# Altium PCB mas-cdc.PcbDoc
Units mil, origin at the board's own origin, x right, y up, seen from the top; angles counter-clockwise.
Board outline 472.44 x 787.4 mil, 4 copper layers (Top Layer, SIG, GND, Bottom Layer), stack 23.756 mil thick; 31 components, 28 nets, 156 pads, 47 vias.
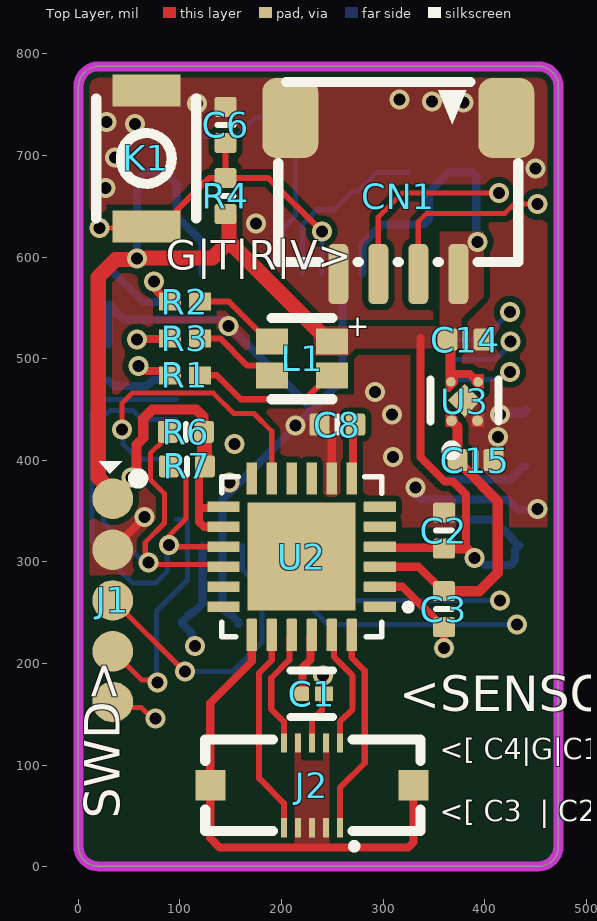
[diagram p0: Top Layer view]
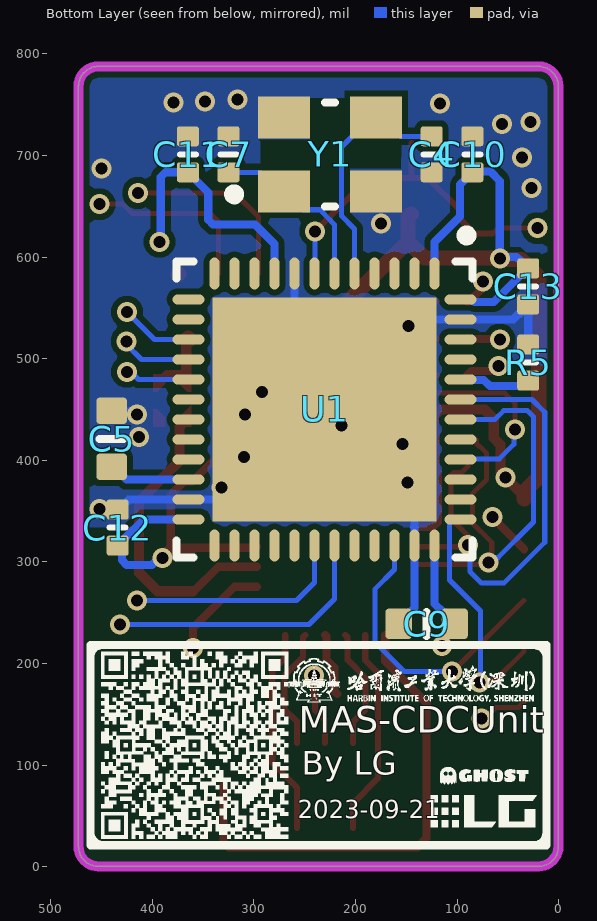
[diagram p1: Bottom Layer view, seen from below]
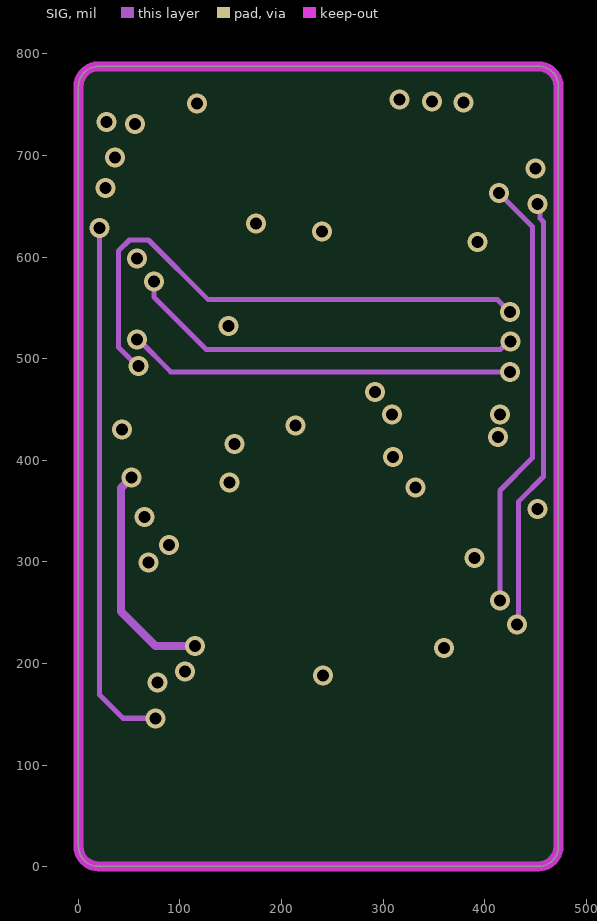
[diagram p2: SIG]
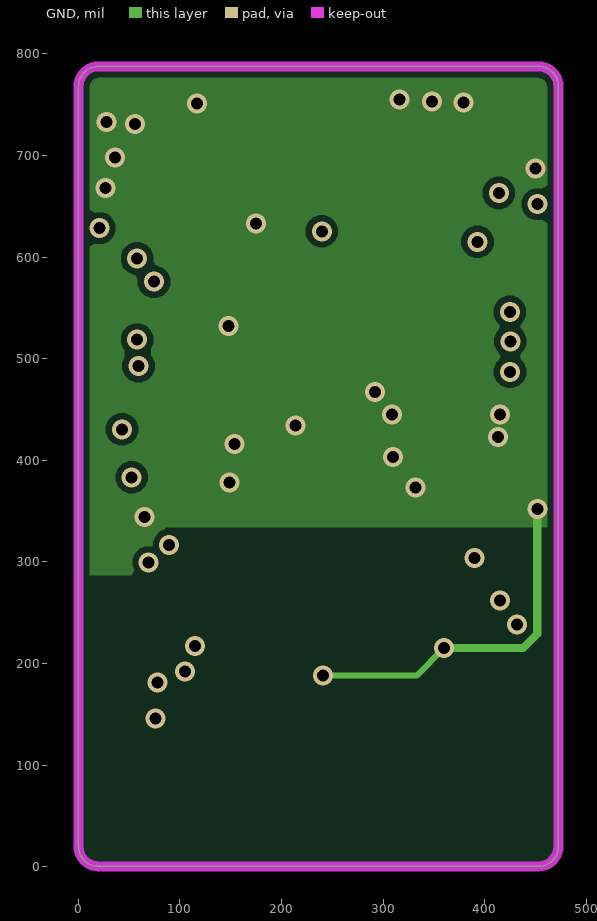
[diagram p3: GND]
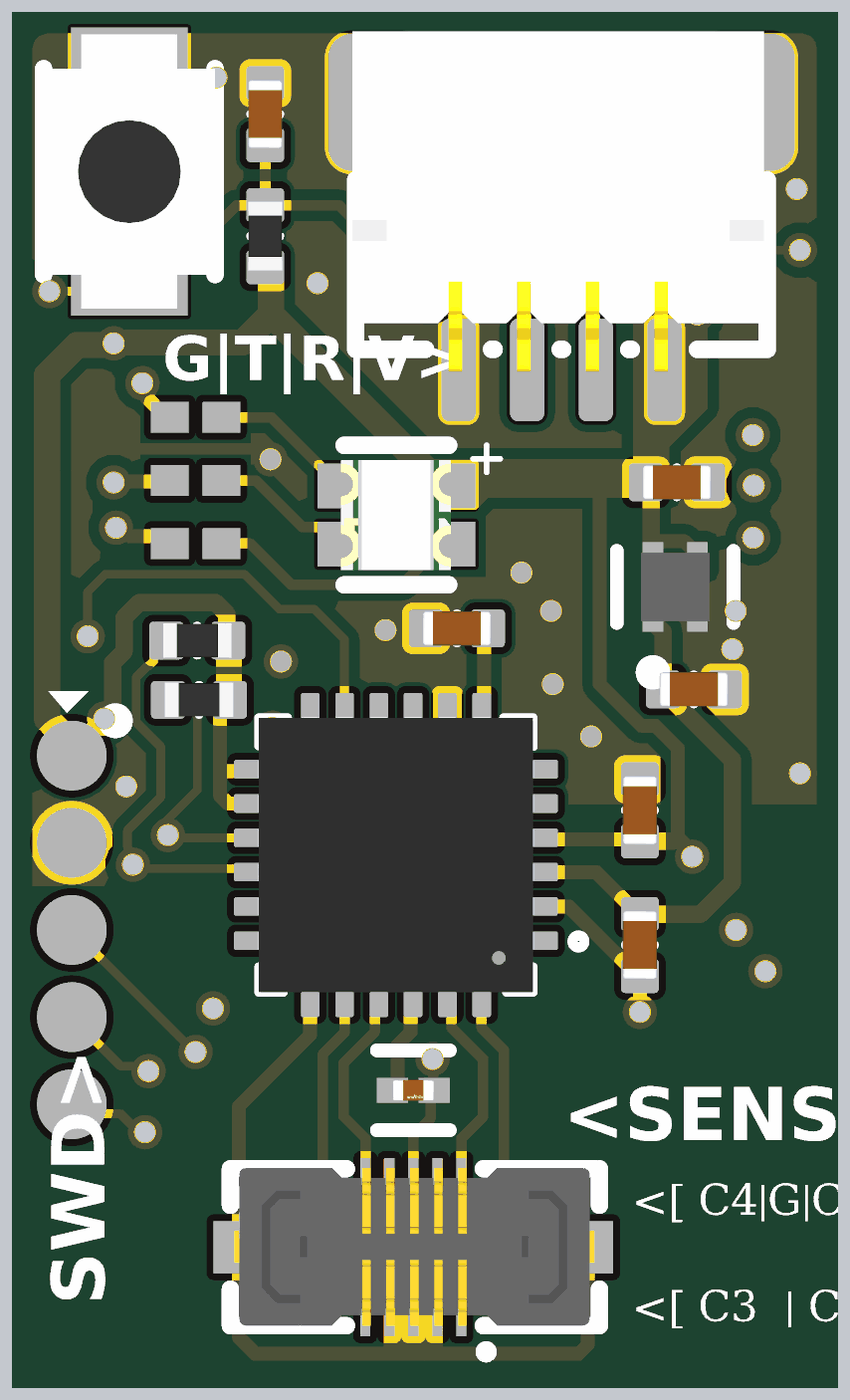
[diagram p4: 3D render of the assembled board from above, using the file's embedded part models]
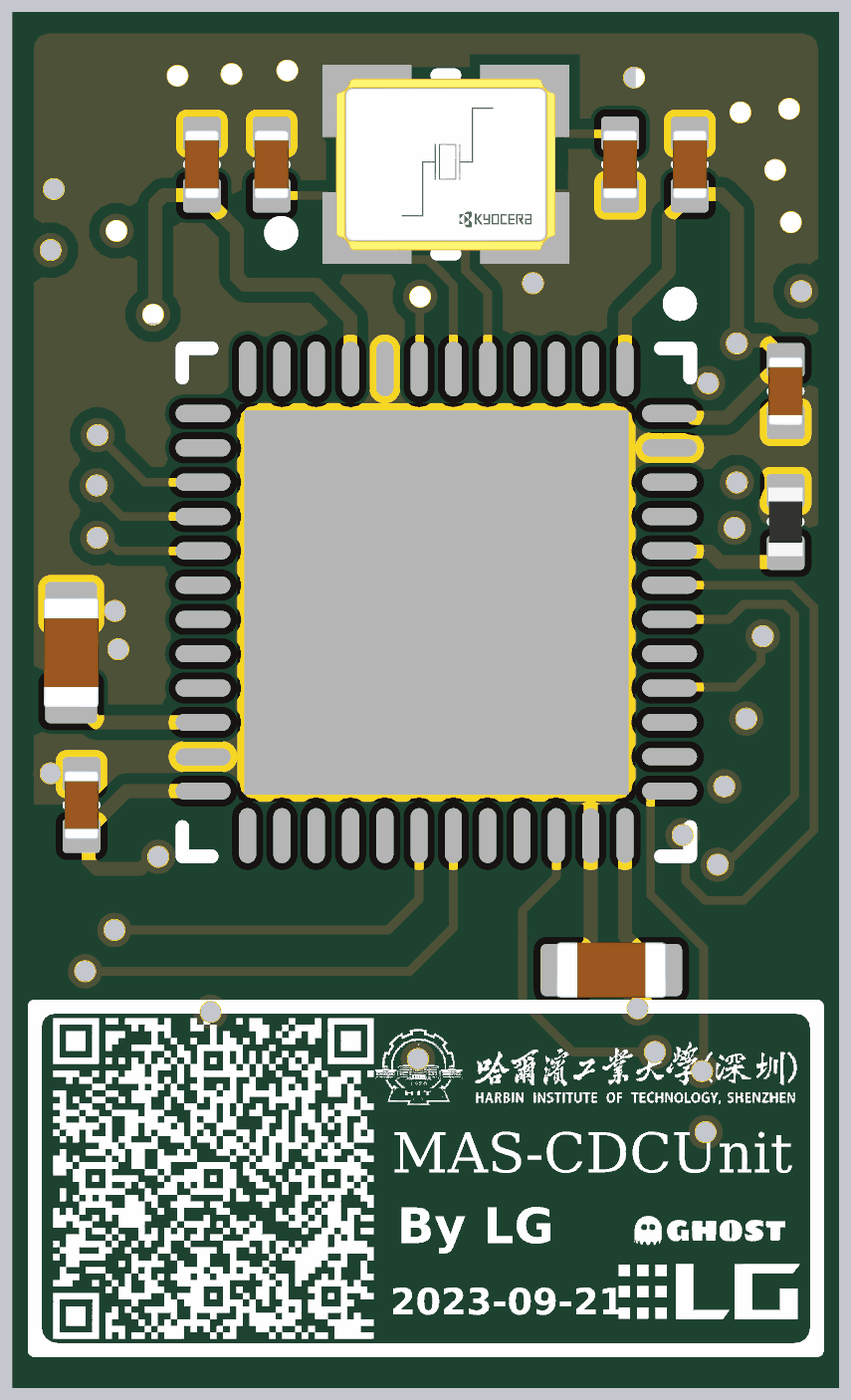
[diagram p5: 3D render of the assembled board from below, using the file's embedded part models]

## Layer stack, top to bottom
Top Solder: solder mask 0.4, Solder Resist, Dk 3.5
Top Layer: signal copper 1.4
Dielectric 2: prepreg 2.8, PP-006, Dk 4.1
SIG: signal copper 1.378
Dielectric 1: dielectric 12.6, FR-4, Dk 4.8
GND: signal copper 1.378
Dielectric 3: prepreg 2.8, PP-006, Dk 4.1
Bottom Layer: signal copper 1.4
Bottom Solder: solder mask 0.4, Solder Resist, Dk 3.5

## Board outline
0.25,19.93 ccw(c19.94,19.93) 19.94,0.25 453.01,0.25 ccw(c453.01,19.93) 472.69,19.93 472.69,767.97 ccw(c453.01,767.97) 453.01,787.65 19.94,787.65 ccw(c19.93,767.97) 0.25,767.97

## Design rules (kind name [scope] priority, off if disabled: settings)
Clearance [All] p1: gap=6 ignorepadtopadclearanceinfootprint=FALSE
PlaneConnect [All] p1: planeconnectstyle=Direct reliefexpansion=20 reliefentries=4 reliefconductorwidth=10 reliefairgap=10
PolygonConnect [All] p1: connectstyle=Direct reliefconductorwidth=10 reliefentries=4 polygonreliefangle="90 Angle" airgapwidth=10
RoutingVias [All] p1: holewidth=11.81 width=19.68 viastyle="Through Hole" minholewidth=11.81 minwidth=19.68 maxholewidth=11.81 maxwidth=19.68
SolderMaskExpansion [All] p1: expansion=4 istentingtop=FALSE
Width [All] p1: maxlimit=60 minlimit=5 preferedwidth=6
29 further rules are at their usual default settings.

## Components (designator, comment, footprint, x,y, rotation, side; value= is the part's Value field where it differs from the comment)
C1 "1pF" FP-GRM033-0_03-IPC_B 230,170 r0 top
C2 "Capacitor 10µF +/-40% 6.3V 0402" CAPC0402(1005)60_L 360,330.67 r270 top value=10uF
C3 "Capacitor 10µF +/-40% 6.3V 0402" CAPC0402(1005)60_L 360,253.38 r90 top value=4.7uF
C4 "Capacitor 100nF +/-20% 25V 0402" CAPC0402(1005)60_L 125,701.1 r270 bottom value=15pf
C5 "Capacitor 4.7µF +/-20% 10V 0603" CAPC0603(1608)100_L 440,421.1 r90 bottom value=4.7µF
C6 "Capacitor 100nF +/-20% 25V 0402" CAPC0402(1005)60_L 145,730 r270 top value=100nF
C7 "Capacitor 100nF +/-20% 25V 0402" CAPC0402(1005)60_L 325,701.1 r90 bottom value=15pf
C8 "Capacitor 10nF +/-20% 50V 0402" CAPC0402(1005)60_L 255,435 r0 top value=10nF
C9 "Capacitor 4.7µF +/-20% 10V 0603" CAPC0603(1608)100_L 130,239 r180 bottom value=4.7µF
C10 "Capacitor 100nF +/-20% 25V 0402" CAPC0402(1005)60_L 85,701.1 r270 bottom value=100nF
C11 "Capacitor 100nF +/-20% 25V 0402" CAPC0402(1005)60_L 365,701.1 r270 bottom value=100nF
C12 "Capacitor 100nF +/-20% 25V 0402" CAPC0402(1005)60_L 434.09,333.66 r270 bottom value=100nF
C13 "Capacitor 100nF +/-20% 25V 0402" CAPC0402(1005)60_L 30,571.1 r90 bottom value=100nF
C14 "Capacitor 1µF +/-20% 10V 0402" CAPC0402(1005)60_L 381.22,518.78 r0 top value=1µF
C15 "Capacitor 1µF +/-20% 10V 0402" CAPC0402(1005)60_L 391,400 r0 top value=1µF
CN1 "SH1.0-4P" CONN-SMD_4P-P1.00_WF10004-01200 315,660 r180 top
J1 "DEBUG-SWD-HEADER" DEBUG-SWD-HEADER-Footprint-1 34,362 r270 top
J2 "BM24-10DS/2-0.35V(51)" CONN-SMD_BM24-10DS-2-0.35V-51 230,80 r180 top
K1 "Button" SW-SMD_ST-1185X 67,697 r270 top
L1 "RGB-LED-1615" RGB-LED-1615-Footprint-1 220,500 r0 top
R1 "500R" RESC0603X26X15ML03T05 105,483.6 r180 top
R2 "500R" RESC0603X26X15ML03T05 105,556.1 r180 top
R3 "500R" RESC0603X26X15ML03T05 105,519.85 r180 top
R4 "Resistor 10K  +/-1 % 0402 63 mW" RESC0402(1005)_L 145,660 r270 top value=10k
R5 "Resistor 10K  +/-1 % 0402 63 mW" RESC0402(1005)_L 30,496.1 r90 bottom value=10k
R6 "Resistor 4K7  +/-1 % 0402 63 mW" RESC0402(1005)_L 106,428 r180 top value=4.7k
R7 "Resistor 4K7  +/-1 % 0402 63 mW" RESC0402(1005)_L 107,394 r180 top value=4.7k
U1 "STM32F411CEU6" STM-UFQFPN48_L 230.47,449.96 r270 bottom
U2 "PCAP04" QFN-24-PAD 220,305 r180 top
U3 "NCP114AMX180TBG" FP-517CU-MFG 380.24,458.78 r0 top
Y1 "25M 3225 12pF" FP-CX3225GB-MFG 225,701.1 r180 bottom

## Footprints (in the part's own frame and the unit in brackets; to place one, negate y for a bottom-side part, rotate by r counter-clockwise, add the part's x,y. Pads: shape width x height; smd on the part's side, far side on the other; paste and mask are expansions set on the pad)
CAPC0402(1005)60_L [mm] "Chip Capacitor, Body 1.0x0.5mm, Height 0.6mm, IPC High Density"
  rrect25% 0.5x0.55 smd: 1(-0.45,0) 2(0.45,0)
  silkscreen extent 0,-0.2 0,0.2, body extent -0.5,-0.25 0.5,0.25, height 0.6
CAPC0603(1608)100_L [mm] "Chip Capacitor, Body 1.6x0.8mm, Height 1.0mm, IPC High Density"
  rrect25% 0.66x0.76 smd: 1(-0.7,0) 2(0.7,0)
  silkscreen extent 0,-0.3 0,0.3, body extent -0.8,-0.4 0.8,0.4, height 0.95
CONN-SMD_4P-P1.00_WF10004-01200 [mm]
  rrect50% 0.5x1.5 smd mask+0.051: 1(-1.5,1.95) 2(-0.5,1.95) 3(0.5,1.95) 4(1.5,1.95)
  rrect50% 1.4x2 smd mask+0.051: 5(2.7,-1.95) 6(-2.7,-1.95)
  silkscreen extent -3,-2.85 3,1.65, body extent -2.95,-2.98 3.05,1.97, height 2.9
CONN-SMD_BM24-10DS-2-0.35V-51 [mm] "板对板连接器"
  rect 0.15x0.48 smd: 1(-0.7,1.06) 2(-0.35,1.06) 3(0,1.06) 4(0.35,1.06) 5(0.7,1.06) 6(0.7,-1.06) 7(0.35,-1.06) 8(0,-1.06) 9(-0.35,-1.06) 10(-0.7,-1.06)
  rect 0.75x0.76 smd: 11(2.54,0) 12(-2.54,0)
  silkscreen extent -2.71,-1.14 2.67,1.55, body extent -2.64,-1.16 2.61,1.14, height 0.8
DEBUG-SWD-HEADER-Footprint-1 [mil]
  round 40 smd: 1(0,0) 2(50,0) 3(100,0) 4(150,0) 5(200,0)
  silkscreen extent -25,20 -15,30
FP-517CU-MFG [mm]
  round 0.27 smd paste+0 mask+0: 1(-0.325,-0.503) 2(0.325,-0.503)
  round 0.242 smd paste+0 mask+0: 3(0.34,0.465) 4(-0.34,0.465)
  rect 0.58x0.58 smd rot 135 paste+0 mask+0: 5(0,0)
  Top Layer region: 0.475,0.653 0.175,0.653 0.175,0.423 0.375,0.223 0.475,0.223
  Top Layer region: -0.475,-0.653 -0.475,-0.122 -0.175,-0.423 -0.175,-0.653
  Top Layer region: 0.475,-0.223 0.475,-0.653 0.175,-0.653 0.175,-0.423 0.375,-0.223
  Top Layer region: -0.475,0.223 -0.475,0.653 -0.175,0.653 -0.175,0.423 -0.375,0.223
  silkscreen extent -0.85,-1.37 0.85,0.53, body extent -0.63,-0.75 0.63,0.75, height 0.25
FP-CX3225GB-MFG [mm]
  rect 1.3x1.05 smd paste+0 mask+0: 1(-1.15,-0.925) 2(1.15,-0.925) 3(1.15,0.925) 4(-1.15,0.925)
  silkscreen extent -2.53,-1.3 0.13,1.3, body extent -1.6,-1.25 1.6,1.25, height 0.9
FP-GRM033-0_03-IPC_B [mil]
  rect 17.88x14.28 smd paste+0 mask+0: 1(-11.98,0) 2(11.98,0)
  silkscreen extent -21,-23 21,23, body extent -27,-13 27,13, height 10
QFN-24-PAD [mm]
  rrect21% 0.81x0.27 smd: 1(-1.955,1.25) 2(-1.955,0.75) 3(-1.955,0.25) 4(-1.955,-0.25) 5(-1.955,-0.75) 6(-1.955,-1.25) 13(1.955,-1.25) 14(1.955,-0.75) 15(1.955,-0.25) 16(1.955,0.25) 17(1.955,0.75) 18(1.955,1.25)
  rrect21% 0.27x0.81 smd: 7(-1.25,-1.955) 8(-0.75,-1.955) 9(-0.25,-1.955) 10(0.25,-1.955) 11(0.75,-1.955) 12(1.25,-1.955) 19(1.25,1.955) 20(0.75,1.955) 21(0.25,1.955) 22(-0.25,1.955) 23(-0.75,1.955) 24(-1.25,1.955)
  rect 2.7x2.7 smd paste-0.495: NC(0,0)
  silkscreen extent -2.75,-2 2,2, body extent -2.01,-2.01 2.01,2.01, height 0.86
RESC0402(1005)_L [mm] "Chip Resistor, Body 1.0x0.5mm, IPC High Density"
  rrect25% 0.5x0.55 smd: 1(-0.45,0) 2(0.45,0)
  silkscreen extent 0,-0.2 0,0.2, body extent -0.5,-0.25 0.5,0.25, height 0.3
RESC0603X26X15ML03T05 [mm] "Chip Resistor, 2-Leads, Body 0.60x0.30mm, IPC Low Density"
  rect 0.55x0.45 smd: 1(-0.375,0) 2(0.375,0)
  body extent -0.32,-0.16 0.32,0.17, height 0.26
RGB-LED-1615-Footprint-1 [mm]
  rect 0.8x0.65 smd paste+0 mask+0.05: 1(0.757,-0.425) 2(0.757,0.425) 3(-0.743,0.425) 4(-0.743,-0.425)
  silkscreen extent -0.75,-1.02 0.77,1.02, body extent -0.8,-0.8 0.8,0.8, height 0.35
STM-UFQFPN48_L [mm] "QFN, 48-Leads, Body 7.1x7.1mm, Pitch 0.5mm, Thermal Pad 5.6x5.6mm, IPC High Density"
  oval 0.8x0.25 smd: 1(-3.4,2.75) 2(-3.4,2.25) 3(-3.4,1.75) 4(-3.4,1.25) 5(-3.4,0.75) 6(-3.4,0.25) 7(-3.4,-0.25) 8(-3.4,-0.75) 9(-3.4,-1.25) 10(-3.4,-1.75) 11(-3.4,-2.25) 12(-3.4,-2.75) 25(3.4,-2.75) 26(3.4,-2.25) 27(3.4,-1.75) 28(3.4,-1.25) 29(3.4,-0.75) 30(3.4,-0.25) 31(3.4,0.25) 32(3.4,0.75) 33(3.4,1.25) 34(3.4,1.75) 35(3.4,2.25) 36(3.4,2.75)
  oval 0.25x0.8 smd: 13(-2.75,-3.4) 14(-2.25,-3.4) 15(-1.75,-3.4) 16(-1.25,-3.4) 17(-0.75,-3.4) 18(-0.25,-3.4) 19(0.25,-3.4) 20(0.75,-3.4) 21(1.25,-3.4) 22(1.75,-3.4) 23(2.25,-3.4) 24(2.75,-3.4) 37(2.75,3.4) 38(2.25,3.4) 39(1.75,3.4) 40(1.25,3.4) 41(0.75,3.4) 42(0.25,3.4) 43(-0.25,3.4) 44(-0.75,3.4) 45(-1.25,3.4) 46(-1.75,3.4) 47(-2.25,3.4) 48(-2.75,3.4)
  rect 5.6x5.6 smd: 49(0,0)
  silkscreen extent -4.47,-3.7 3.7,3.7, body extent -3.55,-3.55 3.55,3.55, height 0.6
SW-SMD_ST-1185X [mm]
  rect 0.8x1.7 smd paste+0 mask+0.051: 1(-1.7,0) 2(1.7,0)
  silkscreen extent -1.5,-1.25 1.5,1.25, body extent -2,-1.25 2,1.25, height 1.6

## Part data
C1: library part CMP-06035-061146-1, "Chip Multilayer Ceramic Capacitors for General Purpose, 0201, 1.0pF, C0G, 30ppm/°C, 0.05pF, 50V", Case Code (Imperial)=0201, Case Code (Metric)=0603, Dielectric=C0G, Max Operating Temperature=125°C, Min Operating Temperature=-55°C, Package Quantity=15000, Voltage Rating (DC)=50V, Capacitance=1pF, Case/Package=0201, Height=0.3mm, Length=0.6mm, Packaging="Tape and Reel", Termination=SMD/SMT, Thickness=300um, Weight=1.2E-05oz, Width=0.3mm
C2 C3: library part CMP-001-00074-3, "Chip Capacitor, 10µF +/-40%, 6.3V, 0402, Thickness 0.6 mm", Case/Package=0402, Max Operating Temperature=85°C, Min Operating Temperature=-55°C, Tolerance=10%, Voltage Rating=6.3V, Mounting Technology=SMT, Pins=2
C4 C6 C7 C10 C11 C12 C13: library part CMP-001-00065-4, "Chip Capacitor, 100nF +/-20%, 25V, 0402, Thickness 0.6 mm", Case/Package=0402, Max Operating Temperature=85°C, Min Operating Temperature=-55°C, Tolerance=10%, Voltage Rating=25V, Mounting Technology=SMT, Pins=2
C5 C9: library part CMP-001-00076-4, "Chip Capacitor, 4.7µF +/-20%, 10V, 0603, Thickness 1 mm", Case/Package=0603, Max Operating Temperature=85°C, Min Operating Temperature=-55°C, Tolerance=10%, Voltage Rating=10V, Mounting Technology=SMT, Pins=2
C8: library part CMP-001-00069-3, "Chip Capacitor, 10nF +/-20%, 50V, 0402, Thickness 0.6 mm", Case/Package=0402, Max Operating Temperature=85°C, Min Operating Temperature=-55°C, Tolerance=5%, Voltage Rating=50V, Mounting Technology=SMT, Pins=2
C14 C15: library part CMP-001-00063-3, "Chip Capacitor, 1µF +/-20%, 10V, 0402, Thickness 0.6 mm", Case/Package=0402, Max Operating Temperature=85°C, Min Operating Temperature=-55°C, Tolerance=10%, Voltage Rating=10V, Mounting Technology=SMT, Pins=2
CN1: "连接器", Current Rating (Max)=500mA, JLCPCB Part Class="Extended Part", LCSC Part Name="1mm 1x4P 卧贴", Manufacturer=ATOM(爱特姆), Manufacturer Part=WF10004-01200, Operating Temperature Range=-25℃~+85℃, Add into BOM=yes, Convert to PCB=yes, Datasheet=https://atta.szlcsc.com/upload/public/pdf/source/20200107/C479990_7EE1728C707014A64676B41D860FB4D7.pdf, Device=WF10004-01200, Gender=公型插针, Mounting Style=卧贴, Name=WF10004-01200, Number of PINs Per Row=4, Number of Rows=1, Pins Structure=1x4P, Pitch=1mm, Reference Series=-, Row Spacing=-, Supplier=LCSC, Supplier Footprint=SMD,P=1mm, Supplier Part=C479990, Symbol=WF10004-01200
J1: library part CMP-002-00074-1, "1.27MM 5P 测试/调试/下载焊点"
J2: "板对板连接器", Current Rating (Max)=5A, JLCPCB Part Class="Extended Part", LCSC Part Name="PIN：10P 间距0.35mm 母 立贴", Manufacturer=HRS(广濑), Operating Temperature Range=-40℃~+85℃, Add into BOM=yes, Contact Plating=金, Convert to PCB=yes, Datasheet=https://atta.szlcsc.com/upload/public/pdf/source/20190903/C424561_940D938A8801F9E5E7B99C1FFBE5CEB4.pdf, Device=BM24-10DS/2-0.35V(51), Gender=母, Manufacturer Part=BM24-10DS/2-0.35V(51), Mounting Style=立贴, Name=BM24-10DS/2-0.35V(51), Number of Pins=10P, Number of Rows=2, Pitch=0.35mm, Supplier=LCSC, Supplier Footprint=SMD,P=0.35mm, Supplier Part=C424555, Symbol=BM24-10DS/2-0.35V(51)
L1: library part CMP-007-00036-2, "RGB LED"
R1 R2 R3: library part CMP-2004-01563-1, Manufacturer="KOA Speer", Part Number=RK73H1HTTC1002F
R4 R5: library part CMP-009-00149-3, "Chip Resistor, 10 kOhms, +/-1 %, 63 mW, -55 to 125 degC, 0402", Case/Package=0402, Max Operating Temperature=155°C, Min Operating Temperature=-55°C, Power=63mW, Tolerance=1%, Pins=2
R6 R7: library part CMP-009-00158-3, "Chip Resistor, 4,7 kOhms, +/-1 %, 63 mW, -55 to 155 degC, 0402", Case/Package=0402, Max Operating Temperature=155°C, Min Operating Temperature=-55°C, Power=63mW, Tolerance=1%, Pins=2
U1: library part STM32F411CEU6-2, "ARM Cortex-M4 32-bit MCU+FPU, 512 KB Flash, 128 KB RAM, 36 I/Os, 48-Pin UFQFPN, -40 to 85 degC, Tray", I/Os (High Current)=36, Operating Frequency(F) (Processor speed) (MHz)=100, Package Description=UFQFPN48, Package Reference="48-Pin Ultra Thin Fine Pitch Quad Flat No-Lead, 7 x 7 x 0.6 mm Body, 0.5 mm Pitch, Exposed Pad", Supply Voltage(Vcc) min (V)=1.7, ComponentLink1Description="Manufacturer URL", ComponentLink1URL=http://www.st.com/, ComponentLink2Description=Datasheet, ComponentLink2URL=http://www.st.com/st-web-ui/static/active/en/resource/technical/document/datasheet/DM00115249.pdf, Core="ARM Cortex-M4", DatasheetVersion="Rev. 6", FLASH Size (Prog) (kB)=512, Internal RAM Size (kB)=128, Mounting Technology="Surface Mount", Packing=Tray
U2: "CDC IC"
U3: library part CMP-07128-000020-1, "IC REG LINEAR 1.8V 300MA 4UDFN", Dropout Voltage=245mV, Manufacturer="ON Semiconductor", Max Junction Temp=+150°C, Max Supply Voltage=5.5V, Min Supply Voltage=2.8V, Nominal Supply Current=50uA, Output Current=300mA, Output Voltage=1.8V, Package=517CU, Temperature="to +150°C", Accuracy Percentage=1%, Automotive=No, Category=IC, ComponentLink2Description=Datasheet, ComponentLink2URL=https://www.onsemi.com/pub/Collateral/NCP114-D.PDF, Device Class L1="Integrated Circuits (ICs)", Device Class L2="Power Management ICs", Device Class L3="Voltage Regulators - Linear", Digikey Description="IC REG LINEAR 1.8V 300MA 4UDFN", Footprint Url=https://www.onsemi.com/pub/Collateral/517CU.PDF, Height=0.6mm, Lead Free=Yes, Manufacturer Part Number=NCP114AMX180TBG, Mouser Description="LDO Voltage Regulators 300 MA CMOS LDO AD O", Number Of Outputs=1, Octopart=https://octopart.com/ncp114amx180tbg-on+semiconductor-56808172, Output Type=Fixed, RoHS=TRUE, Standoff Height=0mm, Temperature Range High=+150°C
Y1: library part CMP-20727-000007-1, "CRYSTAL 16.0000MHZ 8PF SMD", Case/Package=SMD/SMT, ESR (Equivalent Series Resistance)=80R, Frequency=16MHz, Frequency Stability=30ppm, Frequency Tolerance=20ppm, Load Capacitance=8pF, Max Operating Temperature=85°C, Min Operating Temperature=-40°C, Package Quantity=3000, Height=0.035inch, Lead Free="Lead Free", Length=0.126inch, Mount="Surface Mount", Packaging="Tape and Reel", RoHS Compliant=Yes, Series Resistance=80R, Termination=SMD/SMT, Tolerance=20ppm, Weight=0.000564oz, Width=0.098inch

## Via types
v1: diameter 19.68, hole 11.81, Top Layer to Bottom Layer, tented both sides, 47 vias

## Nets (pads, with @x,y where several pads share a name; then routed paths per layer and width w, separated by ;. In a path a pad name is that pad's centre, name@x,y a point inside that pad or via, vN(x,y) a via of type N, cw(c..) or ccw(c..) an arc to the next point about the centre after c; other vN are vias at no path point)
1V8: C3.2 C15.1 U2.3 U3.1 | length 302.3
  Top Layer w8: U2.3 334.96,295.16 359.02,271.1 C3.2
  Top Layer w10: C3.2 394.79,271.1 413,289.31 413,359.63 379.63,393 379.3,393 373.28,399.02 373.28,432.98 367.44,438.83 U3.1
3V3: C2.2 C9.2 C10.2 C11.2 C12.2 C13.2 C14.1 CN1.1 J1.1 L1.2 R4.2 R6.1 R7.1 U1.1 U1.9 U1.24 U1.36 U1.48 U2.4 U2.13 U2.14 U3.3 U3.4 | length 2327.2
  Top Layer w8: R7.1 119,388.28 119,353 ; U2.14 123.69,334.53 119,339.21 119,353 ; U2.13 141.82,353 119,353 ; U2.4 297.91,313.9 359.05,313.9 C2.2 ; 337,520 337,402.91 360.74,379.17 368.83,379.17 381.83,366.17 381.83,315.34 ; C14.1 C14.1@366.54,515.74 ; U3.4 366.54,477.39 366.54,484.49 366.98,484.93 385.38,484.93 393.21,477.1 U3.3 ; 379.49,313 381.83,315.34 ; v1(390,304) 390,307.16 381.83,315.34
  Top Layer w10: J1.1 34,364.62 v1(52.6,383.21) 57.44,388.06 57.44,415.33 63.94,421.83 63.94,440.9 72.86,449.83 116.32,449.83 123,443.14 123,428.72 R6.1 ; C2.2 379.49,313 ; 366.54,484.49 C14.1@366.54,515.74
  Top Layer w15: J1.1 34,368.76 19.75,383.01 19.75,580.39 36.95,597.59 57.1,597.59 v1(58,598.48) ; v1@58,599 132.07,599 148.33,615.26 ; R6.1 124.22,427.5 124.22,394.5 R7.1 ; R4.2 145.98,642.28 148.33,639.94 148.33,615.26 ; L1.2 246.86,516.73 148.33,615.26 ; C14.1 C14.1@365,520.28 ; CN1.1 CN1.1@375,582.28
  SIG w8: v1(52.6,383.21) 42,372.62 42,251 76,217 v1(115,217)
  Bottom Layer w8: C13.2 C13.2@30.98,588.82 ; U1.48 85.29,558.23 82.88,555.82 63.99,555.82 C13.2@30.98,588.82 ; v1(115,217) 115,220.16 111.44,223.72 111.44,230 C9.2 102.44,240.96 111.44,249.96 113.4,249.96 122.2,258.76 U1.36 ; U1.1 122.2,614.8 97,640 97,671.38 91.83,676.56 91.83,677.54 85.37,684 67,684 58,675 v1(58,598.48) 56.4,600.08 41.51,600.08 36.83,595.4 36.83,594.66 C13.2@30.98,588.82 ; U1.9 279.69,612.69 299,632 340.31,632 345,636.69 345,663.38 C11.2 387.03,683.38 391.72,678.7 391.72,616.28 v1(393,615) ; U1.24 408.35,341.69 427.27,322.77 427.27,321.79 433.11,315.94 C12.2 430,311.85 430,301.69 425.31,297 400.16,297 393.16,304 v1(390,304)
"BLED PA7": R3.2 U1.17 | length 476.6
  Top Layer w8: v1(58,518.7) 58.58,519.27 89.66,519.27 R3.2
  SIG w5: v1(58,518.7) 59.3,518.7 91,487 v1(425,487)
  Bottom Layer w5: U1.17 413.51,479.49 421.03,487 v1(425,487)
C1/PC1: J2.10 U2.23 | length 119.9
  Top Layer w6: U2.23 251.84,225.72 251.84,206.19 270,188.03 270,155 257.56,142.56 J2.10
C2/PC2: J2.1 U2.24 | length 205.2
  Top Layer w6: J2.1 257.56,77.56 282,102 282,193 269.21,205.79 U2.24
C3/PC4: J2.5 U2.20 | length 205
  Top Layer w6: U2.20 190.47,203.09 178,190.62 178,87 202.44,62.56 J2.5
C4/PC5: J2.6 U2.21 | length 119.8
  Top Layer w6: J2.6 202.44,142.56 190,155 190,185.64 207.84,203.49 207.84,225.72 U2.21
CREF/PC0: C1.1 U2.22 | length 62.9
  Top Layer w8: C1.1 220.93,172.91 220.93,195.99 228.53,203.59 228.53,226.72 U2.22
"GLED PA6": R2.2 U1.16 | length 488.1
  Top Layer w8: v1(74.51,575.66) 76.74,573.42 76.74,567.63 88.27,556.1 R2.2
  SIG w5: v1(74.51,575.66) 74.51,560.49 126,509 415.39,509 423.39,517 v1(425.32,517)
  Bottom Layer w5: U1.16 410.73,499.17 425.32,513.76 v1(425.32,517)
GND: C1.2 C2.1 C3.1 C4.2 C5.2 C6.1 C7.2 C8.1 C9.1 C10.1 C11.1 C12.1 C13.1 C14.2 C15.2 CN1.4 CN1.5 CN1.6 J1.2 J2.8 K1.1 R5.2 U1.8 U1.23 U1.35 U1.47 U1.49 U2.2 U2.8 U3.2 U3.5 Y1.2 Y1.4 | length 1470.4
  Top Layer w6: J2.8 230,144 239.86,153.86 239.86,167.88 C1.2 241.49,170.49 241.49,187.51 v1(241,188)
  Top Layer w8: J1.2 34,312.58 65.19,343.77 v1(65.19,344.35) ; C8.1 237.28,434.02 249.53,421.77 U2.8 ; U2.2 319.21,275.47 359.02,235.67 C3.1 v1(360,215)
  GND w6: v1(241,188) 333,188 v1(360,215)
  GND w8: v1(360,215) 438,215 451.85,228.85 v1(451.85,351.85)
  Bottom Layer w8: R5.2 C13.1 30.98,553.38 36.83,547.54 36.83,546.56 44.84,538.54 U1.47 141.89,538.54 U1.49 ; C9.1 157.56,240.96 148.56,249.96 146.6,249.96 141.89,254.67 U1.35 141.89,361.38 U1.49 ; U1.8 260,479.49 U1.49 ; v1(332,373) 332,366.08 336.71,361.38 U1.23 423.11,361.38 433.11,351.38 C12.1 434.33,351.61 451.61,351.61 v1(451.85,351.85)
  Bottom Layer w10: v1(415,445) 416.83,446.83 438.17,446.83 C5.2
  other v1: 149,378 310,403 154,416 413,423 214,434 309,445 292,467 148,532 175,633 27,668 450,687 36,698 56,731 28,733 117,751 379,752 348,753 316,755
GP: J2.2 J2.3 J2.4 J2.7 J2.9 J2.11 J2.12 U2.19 | length 478.9
  Top Layer w8: U2.19 170.79,201.79 130,161 J2.11 130,28 139.18,18.82 324.82,18.82 330,24 J2.12
"I2C1_SCL PB6": R6.2 U1.42 U2.16 | length 462.5
  Top Layer w5: R6.2@84.27,423 80.94,419.67 80.94,416.26 78.01,413.33 77.36,413.33 70.94,406.91 70.94,381.09 85,367.03 85,338.21 65.94,319.15 65.94,309.72 66.24,309.42 66.24,302.26 71.2,297.3 140.89,297.3 U2.16
  Bottom Layer w5: v1(69.05,299.45) 66.58,299.45 62.03,304 60,304 24.75,339.25 24.75,442.75 30.8,448.8 54.2,448.8 62.88,440.12 U1.42
"I2C1_SDA PB7": R7.2 U1.43 U2.15 | length 494.5
  Top Layer w5: v1@84.58,320.96 106,342.38 106,385.02 103.07,387.95 95.33,387.95 R7.2 ; v1@84.95,320.59 88.92,320.59 v1@91.12,318.4 ; v1(89.14,316.41) v1@91.12,318.4 ; U2.15 94.68,314.84 v1@91.12,318.4
  Bottom Layer w5: v1(89.14,316.41) 87.39,314.67 87.39,290.35 76.04,279 54,279 13.75,319.25 13.75,447.31 26.24,459.8 U1.43
"INTN PG5/PB4": U1.40 U2.11 | length 313.1
  Top Layer w5: v1(43.09,430.46) 43.09,456.09 53,466 133,466 153,446 173,446 190.47,428.53 U2.11
  Bottom Layer w5: v1(43.09,430.46) 44.21,429.34 44.21,415.59 58.43,401.37 95.99,401.37 U1.40
NetC5_1: C5.1 U1.22 | length 80.8
  Bottom Layer w8: U1.22 425.56,381.06 438.04,393.54 C5.1
NetC8_2: C8.2 U2.7 | length 54.5
  Top Layer w8: U2.7 270.53,383.28 270.53,432.81 C8.2
NetL1_1: L1.1 R1.1 | length 149.5
  Top Layer w6: R1.1 136.4,483.6 160,460 223.59,460 246.86,483.27 L1.1
NetL1_3: L1.3 R2.1 | length 87.3
  Top Layer w6: R2.1 148.42,556.1 187.8,516.73 L1.3
NetL1_4: L1.4 R3.1 | length 86.1
  Top Layer w6: R3.1 139.59,519.85 166.38,493.06 180.95,493.06 L1.4
NetR5_1: R5.1 U1.44 | length 71.6
  Bottom Layer w8: R5.1 35.49,472.9 67.54,472.9 73.77,479.13 96.26,479.13 U1.44
OSC_IN: C4.1 U1.5 Y1.3 | length 238.5
  Bottom Layer w5: C4.1 156.1,718.82 174.8,737.52 Y1.3 184.65,737.52 213.81,708.35 213.81,640.49 200.94,627.62 U1.5
OSC_OUT: C7.1 U1.6 Y1.1 | length 173.9
  Bottom Layer w5: U1.6 220.63,631.75 224.81,635.94 224.81,636.28 235.04,646.51 252.11,646.51 Y1.1 275.2,664.68 293.9,683.38 C7.1
"RLED PA5": R1.2 U1.15 | length 647.7
  Top Layer w8: v1(59.32,492.74) 62.48,492.74 67.41,487.81 86.02,487.81 R1.2
  SIG w5: v1(59.32,492.74) 58.02,492.74 39.66,511.1 39.66,606.08 50.4,616.83 69.17,616.83 128,558 412.7,558 v1(424.83,545.87)
  Bottom Layer w5: U1.15 397.82,518.86 v1(424.83,545.87)
RST: C6.2 J1.5 K1.2 R4.1 U1.7 | length 919.1
  Top Layer w5: v1(21.09,628.44) 59.64,628.44 K1.2@65,623.08 ; J1.5 39.47,156.53 62,156.53 72.53,146 v1(76,146)
  Top Layer w6: K1.2@65,623.08 82.72,623.08 97.46,637.82 97.46,646.46 128.69,677.69 R4.1 ; C6.2 R4.1 187.27,677.72 v1(239.73,625.26)
  SIG w5: v1(21.09,628.44) 21.09,168.91 44,146 v1(76,146)
  Bottom Layer w5: v1(239.73,625.26) 240.02,624.97 240.02,584.11 U1.7
"SWCLK PA14": J1.4 U1.37 | length 240.1
  Top Layer w5: J1.4 62.19,183.81 75.19,183.81 v1(78,181)
  Bottom Layer w5: v1(78,181) 77,182 77,251.64 107.48,282.12 107.48,339.45 105.24,341.69 U1.37
"SWDIO PA13": J1.3 U1.34 | length 291.2
  Top Layer w5: J1.3 34.5,262 104.5,192 v1(105,192)
  Bottom Layer w5: v1(105,192) 152,192 181,221 181,273 161.57,292.43 U1.34
"USART1_RX PA10": CN1.2 U1.31 | length 877.3
  Top Layer w5: CN1.2 334.69,634.68 343,643 419.94,643 428.94,652 v1(451.85,652)
  SIG w5: v1(432.01,238.32) 433.51,239.82 433.51,359.51 458,384 458,634.56 454.66,637.9 454.66,649.19 v1(451.85,652)
  Bottom Layer w5: U1.31 220.63,263.37 245.68,238.32 v1(432.01,238.32)
"USART1_TX PA9": CN1.3 U1.30 | length 831
  Top Layer w5: CN1.3 295.31,639.32 319,663 v1(414,663)
  SIG w5: v1(414,663) 447,630 447,402.11 415.16,370.28 v1(415.16,262)
  Bottom Layer w5: U1.30 240.31,279.69 258,262 v1(415.16,262)
pads on no net: U1.2 U1.3 U1.4 U1.10 U1.11 U1.12 U1.13 U1.14 U1.18 U1.19 U1.20 U1.21 U1.25 U1.26 U1.27 U1.28 U1.29 U1.32 U1.33 U1.38 U1.39 U1.41 U1.45 U1.46 U2.1 U2.5 U2.6 U2.9 U2.10 U2.12 U2.17 U2.18 U2.NC

## Polygon pours and split planes (outlines as drawn)
GND on Top Layer "NONET_L01_P-001" (solid, remove dead copper, pour order 9): 0,794 1,793 478,793 478,335 477,334 85,334 85,303 69,287 0,287
3V3 on Top Layer "NONET_L01_P-001" (solid, pour order 1): 399,625 399,561 377,539 377,510 273,510 266,503 232,503 232,532 356,532 356,625
GP on Top Layer "NONET_L01_P-001" (solid, pour order 0): 213,131 213,18.82 247,18.82 247,131 241,131 241,104 221,104 219,106 219,131
GND on GND "NONET_L01_P-001" (solid, remove dead copper, pour order 7): 0,794 1,793 478,793 478,335 477,334 85,334 85,303 69,287 0,287
GND on Bottom Layer "NONET_L01_P-001" (solid, remove dead copper, pour order 11): 0,792 482,792 482,340 476,334 0,334

## Keep-outs
Keep-Out Layer:
  the board outline again, w10

## Other copper
Bottom Layer:
  pour cut-out: 154,757 244,757 245,756 245,716 296,716 293.9,713.9 293.9,683.38 245.38,683.38 243.57,681.57 243.57,646.51 207.58,646.51 205.15,644.08 205,644.23 205,687 156,687 155,686

## Silkscreen, mask and mechanical layers (free items; w line width, h text height)
Top Overlay:
  region: 20.43,399 43.57,399 31.11,386.54
  text "G|T|R|V>" at 86,577.47 h50
  text "<SENSOR" at 316,141.33 h60
  text "<[ C4|G|C1 ]" at 355.98,98.64 h35
  text "SWD>" at 52.67,47 h60 r90
  text "<[ C3  | C2 ]" at 355.98,37.64 h35
Bottom Overlay:
  drawing of 419 lines, arcs and shapes, not listed
  text "MAS-CDCUnit" at 256,123 h45
  text "By LG" at 252.97,82.4 h40
  text "2023-09-21" at 256.98,41.46 h30
Mechanical 1:
  the board outline again, w0.5

## Text inside footprints (layer, text, board x,y; h text height)
L1: Top Overlay "+" at 286.85,540.28 h20.59 r180